# Altium PCB BSR049A.PcbDoc (part 3 of 3)
Units mil, origin at the board's own origin, x right, y up, seen from the top; angles counter-clockwise.
Board outline 3160 x 2500 mil, 4 copper layers (Top Layer1, Layer2, Layer3, Bottom Layer4), stack 61.2 mil thick; 91 components, 27 nets, 205 pads, 285 vias.
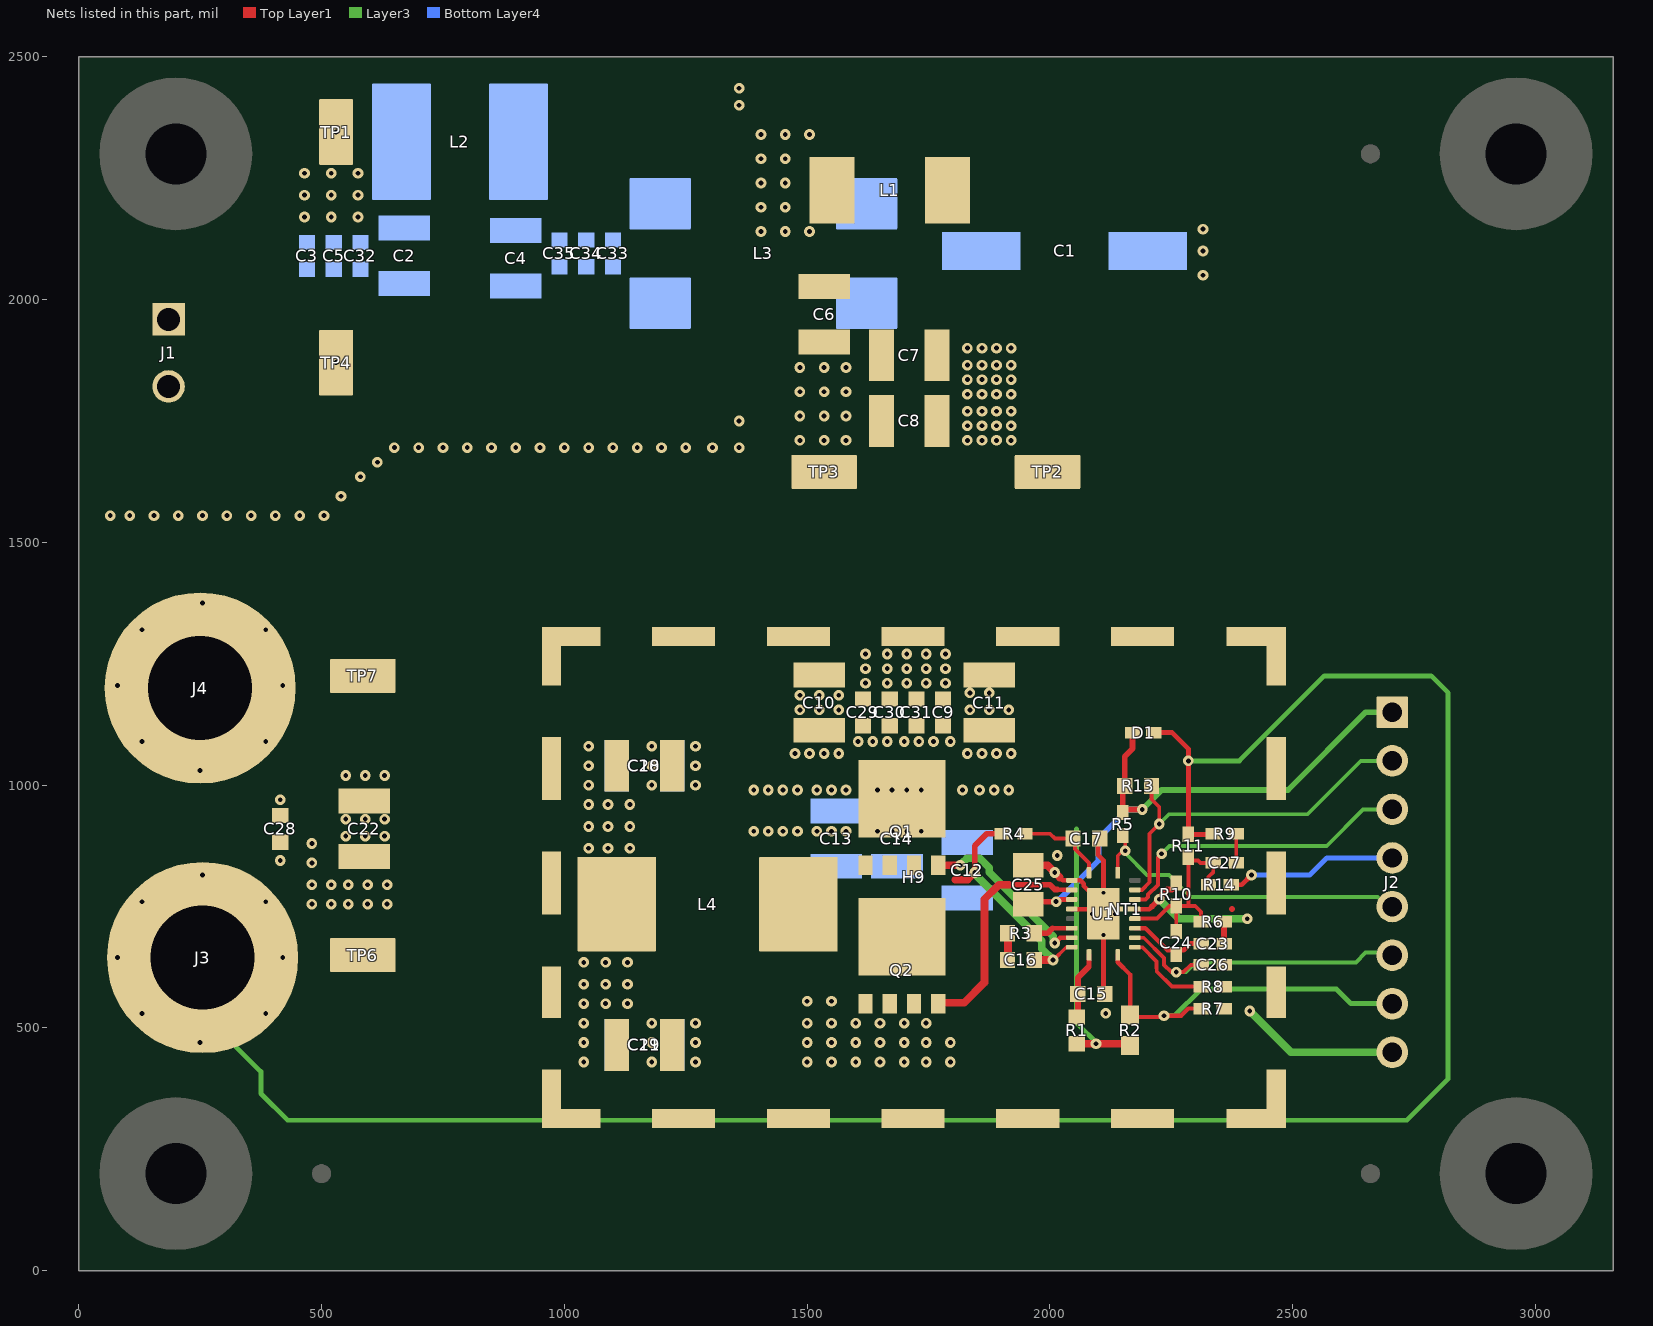
[diagram p4: the nets of this part, all layers, seen from the top]

## Via types
v1: diameter 22, hole 10, Top Layer1 to Bottom Layer4, tented both sides, 263 vias
v2: diameter 22, hole 10, Top Layer1 to Bottom Layer4, 18 vias
v3: diameter 19.68, hole 7.87, Top Layer1 to Bottom Layer4, 4 vias

## Nets (pads, with @x,y where several pads share a name; then routed paths per layer and width w, separated by ;. In a path a pad name is that pad's centre, name@x,y a point inside that pad or via, vN(x,y) a via of type N, cw(c..) or ccw(c..) an arc to the next point about the centre after c; other vN are vias at no path point)
AGND: C26.1 J2.8 NT1.1 R7.1 R8.2 R10.1 U1.6 | length 638.7
  Top Layer1 w9.5: U1.6@2174.96,744.84 2204.84,744.84 2210,750
  Top Layer1 w12: 2210,750 v1(2225,765) 2230,770 2230,773.66 2241.34,785 2251,785 R10.1@2260,794 ; 2374.84,744.84 2375,745
  Layer3 w16: v1(2225,765) 2265,725 v1(2406.38,725) ; v1(2411.38,535) 2496.38,450 2695,450 J2.8@2705,440
COMP: C23.1 C24.1 U1.4 | length 154.5
  Top Layer1 w9: U1.4@2174.96,705.47 2196.51,705.47 2241.98,660 2251.38,660 C24.1@2260,651.38
  Top Layer1 w10: C24.1@2270,660 2275,660 2288.62,673.62 C23.1@2311.38,673.62
EN: J2.7 R2.2 R7.2 U1.1 | length 801.3
  Top Layer1 w8: 2285,540 R7.2@2311.38,540
  Top Layer1 w9: U1.1@2139.53,650.35 2139.53,635.47 2165,610 2165,522.56 2232.56,522.56 v1(2235,525) 2270,525 2285,540
  Layer3 w10: v1(2235,525) 2256.38,525 2311.38,580 2590,580 2620,550 2695,550 J2.7@2705,540
FB: C24.2 C27.2 R6.1 R10.2 R11.2 R14.2 U1.5 | length 430.9
  Top Layer1 w8: U1.5@2174.96,725.16 2220.16,725.16 2246.38,751.38 R10.2@2260,751.38 ; C24.2@2260,698.62 R10.2@2260,751.38 ; R6.1@2311.38,718.62 2311.38,739.27 2299.27,751.38 2285,751.38 ; R14.2@2326.38,795 2326.38,811.38 2336.38,821.38 C27.2@2336.38,840 2310,840 2305,845 2291.38,845 R11.2@2285,851.38 2285,751.38 ; R10.2@2260,751.38 2285,751.38
GND: C1.2 C6.2 C7.2 C8.2 C9.2 C10.2 C11.2 C12.2 C13.2 C14.2 C15.2 C17.2 C18.2 C19.2 C20.2 C21.2 C22.2 C25.2 C28.2 C29.2 C30.2 C31.2 H9.1 J4.1 L3.2 NT1.2 Q2.1 Q2.2 Q2.3 TP3.1 TP7.1 U1.12 U1.15 U1.21@2110,735 | length 573.3
  Top Layer1 w9.5: 2020,810 2026.1,803.9 U1.12@2045.04,803.9 2062.79,803.9 2069.47,797.21 2069.47,792.28 2110,751.76 U1.21@2110,735 ; U1.15@2045.04,744.84 U1.21@2100.16,744.84
  Top Layer1 w10: C17.2@2098.62,890 2098.62,856.38 2110,845 v3(2110,778.31) U1.21@2110,751.76 ; U1.21@2110,735 v3(2110,691.69) 2110,572.56 C15.2@2112.56,570
  Top Layer1 w16: C25.2@1955,835 1995,835 v1(2010,820) 2020,810
  other v1: 1180,430 1270,430 1500,430 1550,430 1600,430 1650,430 1700,430 1745,430 1795,430 1180,470 1270,470 1500,470 1550,470 1600,470 1650,470 1700,470 1745,470 1795,470 1180,510 1270,510 1500,510 1550,510 1600,510 1650,510 1700,510 1745,510 2115,530 1500,555 1550,555 2015,855 550,930 590,930 630,930 415,970 1180,1000 1270,1000 550,1020 590,1020 630,1020 1180,1040 1270,1040 1180,1080 1270,1080 1485,1185 1525,1185 1565,1185 1835,1190 1875,1190 1620,1210 1665,1210 1705,1210 1745,1210 1785,1210 1620,1240 1665,1240 1705,1240 1745,1240 1785,1240 1620,1270 1665,1270 1705,1270 1745,1270 1785,1270 65,1555 105,1555 155,1555 205,1555 255,1555 305,1555 355,1555 405,1555 455,1555 505,1555 540,1595 580,1635 615,1665 650,1695 700,1695 750,1695 800,1695 850,1695 900,1695 950,1695 1000,1695 1050,1695 1100,1695 1150,1695 1200,1695 1250,1695 1305,1695 1360,1695 1485,1710 1535,1710 1580,1710 1360,1750 1485,1760 1535,1760 1580,1760 1485,1810 1535,1810 1580,1810 1485,1860 1535,1860 1580,1860 2315,2050 2315,2100 2315,2145 1360,2400 1360,2435
  other v2: 250,1030 130,1090 385,1090 80,1205 420,1205 130,1320 385,1320 255,1375
  other v3: 2086.38,735 2133.62,735
Gnd_EMI: C2.2 C3.2 C4.2 C5.2 C32.2 C33.2 C34.2 C35.2 J1.2 L3.3 TP4.1
  other v2: 530,1870
HO: Q1.4 U1.18 | length 362.4
  Top Layer1 w9.5: v1(2010,675) 2020.79,685.79 U1.18@2045.04,685.79
  Top Layer1 w16: Q1.4@1770,834.96 v1(1815,834.96)
  Layer3 w16: v1@1820,840 1829.42,849.42 1855.58,849.42 1875,830 1875,820.93 2007,688.93 2007,678 v1(2010,675)
ILIM: C17.1 R4.1 U1.11 | length 189.3
  Top Layer1 w8: R4.1@1948.62,900 2000,900 2010,890 C17.1@2047.44,890 2051.38,890 2051.38,868.62 2080.47,839.53 U1.11@2080.47,819.65
LO: Q2.4 U1.13 | length 480.6
  Top Layer1 w9.5: 2015.79,784.21 U1.13@2045.04,784.21
  Top Layer1 w10: 2015,785 2015.79,784.21
  Top Layer1 w12: 1915,795 2000,795 2010,785 2015,785
  Top Layer1 w16: Q2.4@1770,551.83 1823.17,551.83 1865,593.66 1865,765 1895,795 1915,795
NetC4_1: C4.1 C33.1 C34.1 C35.1 L2.2 L3.4
NetC6_1: C6.1 L1.1 L3.1
  other v1: 1405,2140 1455,2140 1505,2140 1405,2190 1455,2190 1405,2240 1455,2240 1405,2290 1455,2290 1405,2340 1455,2340 1505,2340
NetC15_1: C15.1 R1.2 U1.20 | length 135.8
  Top Layer1 w9.5: 2080.47,625.47 U1.20@2080.47,650.35
  Top Layer1 w10: 2080,625.94 2080.47,625.47
  Top Layer1 w12: R1.2@2057.44,525 C15.1@2057.44,570 2057.44,603.39 2080,625.94
NetC16_1: C16.1 R3.2 | length 55
  Top Layer1 w16: C16.1@1913.5,640 R3.2@1913.5,695
NetC23_2: C23.2 R6.2 | length 45
  Top Layer1 w12: C23.2@2358.62,673.62 R6.2@2358.62,718.62
NetC27_1: C27.1 R9.2 | length 60
  Top Layer1 w8: C27.1@2383.62,840 R9.2@2383.62,900
NetR3_1: R3.1 U1.17 | length 84.7
  Top Layer1 w8: R3.1@1961.5,695 R3.1@1961.5,697.87
  Top Layer1 w9.5: 2005.47,705.47 U1.17@2045.04,705.47
  Top Layer1 w10: 1995,695 1997.87,697.87
  Top Layer1 w12: R3.1@1967.56,695 1995,695 ; 1997.87,697.87 2005.47,705.47
PGOOD: J2.5 R5.2 U1.10 | length 692.8
  Top Layer1 w8: U1.10@2139.53,819.65 2139.53,854.53 2150,865 v1(2155,865) 2155,891.38 R5.2@2150,896.38
  Layer3 w8: v1(2155,865) 2155,860 2200,815 2245,815 2290,770 2675,770 J2.5@2705,740
RT: R8.1 U1.2 | length 183.2
  Top Layer1 w8: U1.2@2174.96,666.1 2190.28,666.1 2219.13,637.25 2219.13,623.42 2220,622.55 2220,616.38 2251.38,585 2307.76,585 R8.1@2311.38,588.62
SS: C26.2 J2.6 U1.3 | length 647.8
  Top Layer1 w8: U1.3@2174.96,685.79 2193.04,685.79 2235,643.83 2235,630 2250,615 v1(2260,615) 2275,615 2290,630 C26.2@2311.38,630
  Layer3 w8: v1(2260,615) 2280,615 2300,635 2630,635 2650,655 2690,655 J2.6@2705,640
SW: C16.2 L4.1 Q1.1 Q1.2 Q1.3 Q2.5 R4.2 U1.19 | length 503.1
  Top Layer1 w8: v1(2006.38,640) 2007.35,640 2033.45,666.1 U1.19@2045.04,666.1
  Top Layer1 w12: v1(1845,820) 1845,875 1870,900 R4.2@1901.38,900
  Top Layer1 w16: 1805,805 1830,805 v1(1845,820) ; C16.2@1967.56,640 v1(2006.38,640)
  Layer3 w16: v1(1845,820) 1845,817.17 1983.13,679.05 1983.13,663.25 v1(2006.38,640)
SYNCIN: J2.2 R13.2 U1.8 | length 783.8
  Top Layer1 w8: U1.8@2174.96,784.21 2189.21,784.21 2205,800 2205,900 v1(2225,920) 2225,955 2209.09,970.91 R13.2@2209.09,998.46
  Layer3 w8: v1(2225,920) 2245,940 2530,940 2640,1050 J2.2@2705,1050
SYNCOUT: J2.3 U1.7 | length 642.4
  Top Layer1 w8: U1.7@2174.96,764.53 2196.65,764.53 2202.13,770 2202.13,774.47 2222.37,794.72 2222.37,851 v1(2230,858.62)
  Layer3 w8: v1(2230,858.62) 2246.38,875 2570,875 2645,950 J2.3@2705,950
Trim: J2.4 R14.1 | length 354.2
  Top Layer1 w10: R14.1@2373.62,795 2395,795 v1(2415,815)
  Bottom Layer4 w10: v1(2415,815) 2535,815 2570,850 J2.4@2705,850
VCC: C25.1 D1.1 J2.1 R5.1 R13.1 U1.14 | length 1182.5
  Top Layer1 w9.5: v1(2012.71,760.13) 2017.12,764.53 U1.14@2045.04,764.53
  Top Layer1 w12: C25.1@1955,750 1965,760 v1@2005,760 ; R5.1@2150,943.62 R5.1@2150,945 ; R13.1@2150,990 R5.1@2150,945 ; R13.1@2153.98,998.46 2153.98,1058.98 2170.16,1075.16 D1.1@2170.16,1108.21 ; v1(2190,950) 2155,950 R5.1@2150,945
  Layer3 w12: v1(2190,950) 2190,955 2192.5,952.5 2230,990 2490,990 2650,1150 2695,1150 J2.1@2705,1140
  Bottom Layer4 w12: v1(2012.71,760.13) 2015.13,760.13 2100,845 2100,890 2160,950 v1(2190,950)
VIN: C1.1 C7.1 C8.1 C9.1 C10.1 C11.1 C12.1 C13.1 C14.1 C29.1 C30.1 C31.1 L1.2 Q1.5 R1.1 R2.1 TP2.1 | length 573.6
  Top Layer1 w16: R1.1@2055,467.44 R2.1@2165,467.44
  Layer3 w10: 2055,910 2055,510 v1@2100,465
  other v1: 2095,467.44 1390,905 1420,905 1450,905 1480,905 1520,905 1550,905 1580,905 1645,905 1675,905 1705,905 1735,905 1390,990 1420,990 1450,990 1480,990 1520,990 1550,990 1580,990 1645,990 1675,990 1705,990 1735,990 1820,990 1855,990 1885,990 1915,990 1475,1065 1505,1065 1535,1065 1565,1065 1830,1065 1860,1065 1890,1065 1920,1065 1605,1090 1635,1090 1665,1090 1700,1090 1730,1090 1760,1090 1795,1090 1485,1155 1525,1155 1565,1155 1835,1155 1875,1155 1915,1155 1830,1710 1860,1710 1890,1710 1920,1710 1830,1740 1860,1740 1890,1740 1920,1740 1830,1770 1860,1770 1890,1770 1920,1770 1830,1805 1860,1805 1890,1805 1920,1805 1830,1835 1860,1835 1890,1835 1920,1835 1830,1865 1860,1865 1890,1865 1920,1865 1830,1900 1860,1900 1890,1900 1920,1900
Vin_EMI: C2.1 C3.1 C5.1 C32.1 J1.1 L2.1 TP1.1
  other v1: 465,2170 520,2170 575,2170 465,2215 520,2215 575,2215 465,2260 520,2260 575,2260
  other v2: 530,2345
VOUT: C18.1 C19.1 C20.1 C21.1 C22.1 C28.1 D1.2 J3.1 L4.2 R9.1 R11.1 TP6.1 | length 4561.4
  Top Layer1 w10: D1.2@2213.46,1108.21 2251.79,1108.21 2285,1075 v1(2285,1050) R11.1@2285,898.62 R9.1@2335,898.62
  Layer3 w10: J3.1@255,645 255,530 375,410 375,365 430,310 2735,310 2820,395 2820,1190 2785,1225 2565,1225 2390,1050 v1(2285,1050)
  other v1: 1040,430 1040,470 1040,510 1040,550 1085,550 1130,550 1040,590 1085,590 1130,590 1040,635 1085,635 1130,635 480,755 520,755 555,755 595,755 635,755 480,795 520,795 555,795 595,795 635,795 480,840 415,845 1050,870 1090,870 1135,870 480,880 550,895 590,895 630,895 1050,915 1090,915 1135,915 1050,960 1090,960 1135,960 1050,1000 1050,1040 1050,1080
  other v2: 250,470 130,530 385,530 80,645 420,645 130,760 385,760 255,815
pads on no net: FID1.1 FID2.1 FID3.1 FID4.1 FID5.1 FID6.1 H1.1 H2.1 H3.1 H4.1 H5.0 H6.0 H7.0 H8.0 U1.9 U1.16 U1.21@2091.3,707.24 U1.21@2091.3,762.76 U1.21@2128.7,707.24 U1.21@2128.7,762.76

## Polygon pours and split planes (outlines as drawn)
GND on Top Layer1 "GND_L01_P384" (solid, pour order 384): -2.75,1.08 -2.75,1580 480,1580 625,1725 1327.25,1725 1327.25,2501.08 3157.25,2501.08 3157.25,1.08
VOUT on Top Layer1 "VOUT_L01_P383" (solid, remove dead copper, pour order 383): 660,910 0,910 0,395 5,400 660,400
VOUT on Top Layer1 "VOUT_L01_P380" (solid, remove dead copper, pour order 380): 1155,395 1155,610 1207.12,610 1207.12,905 1150,905 1150,1125 1010,1125 1010,395
AGND on Top Layer1 "AGND_L01_P377" (solid, remove dead copper, pour order 377): 2425,515 2340,515 2340,755 2425,755
VIN on Top Layer1 "VIN_L01_P382" (solid, remove dead copper, pour order 382): 1725,2280 1725,2005 1725,1625 1745,1605 2060,1605 2075,1620 2075,2280 2055,2300 1745,2300
SW on Top Layer1 "SW_L01_P379" (solid, remove dead copper, pour order 379): 1830,605 1440,605 1400,645 1400,855 1410,865 1830,865
VIN on Top Layer1 "VIN_L01_P381" (solid, remove dead copper, pour order 381): 2090,890 1320,890 1300,910 1300,1145 1320,1165 2075,1165 2090,1150
NetC6_1 on Top Layer1 "NETC6_1_L01_P378" (solid, remove dead copper, pour order 378): 1340,1995 1590,1995 1600,2005 1600,2345 1590,2355 1345,2355 1330,2340 1330,2005
GND on Layer3 "GND_L03_P389" (solid, pour order 389): 0,0 0,1580 480,1580 625,1725 1330,1725 1330,2500 3160,2500 3160,0
VOUT on Layer3 "VOUT_L03_P388" (solid, remove dead copper, pour order 388): 1125,395 1125,535 1155,535 1155,975 1125,975 1125,1125 1010,1125 1010,985 935,910 0,910 0,395 1010,395
VIN on Layer3 "VIN_L03_P387" (solid, remove dead copper, pour order 387): 1890,2035 2020,2035 2180,1875 2180,1056.16 2073.84,950 1895,950 1895,1205 1805,1295 1805,1690 1805,2000 1840,2035
VIN on Layer3 "VIN_L03_P386" (solid, remove dead copper, pour order 386): 2060,890 1365,890 1345,910 1345,1145 1365,1165 2075,1165 2075,905
Vin_EMI on Layer3 "VIN_EMI_L03_P406" (solid, remove dead copper, pour order 406): 50,1900 235,1900 365,1900 420,1955 420,2070 465,2115 715,2115 730,2130 730,2450 675,2505 455,2505 0,2050 0,1950
VOUT on Bottom Layer4 "VOUT_L04_P393" (solid, remove dead copper, pour order 393): 1155.2,393.7 1155.2,540.14 1199.11,540.14 1199.11,970 1155.2,970 1155.2,1123.7 1009.11,1123.7 1009.11,393.7
VIN on Bottom Layer4 "VIN_L04_P391" (solid, remove dead copper, pour order 391): 1930,890 1375,890 1362.5,902.5 1362.5,992.5 1375,1005 1930,1005
GND on Bottom Layer4 "GND_L04_P398" (solid, pour order 398): 0,0 0,1580 480,1580 625,1725 1330,1725 1330,2500 3160,2500 3160,0
NetC6_1 on Bottom Layer4 "NETC6_1_L04_P392" (solid, remove dead copper, pour order 392): 1345,2120 1674.42,2120 1695,2140.58 1695,2320 1660,2355 1345,2355 1330,2340 1330,2135
VIN on Bottom Layer4 "VIN_L04_P390" (solid, remove dead copper, pour order 390): 1779.39,2159.37 1935.63,2159.37 1944.25,2150.75 1944.25,1709.25 1929.77,1694.77 1785.21,1694.77 1769.25,1710.8 1771.46,2151.47
Vin_EMI on Bottom Layer4 "VIN_EMI_L04_P400" (solid, remove dead copper, pour order 400): 50,1900 235,1900 365,1900 420,1955 420,2070 465,2115 715,2115 730,2130 730,2450 675,2505 455,2505 0,2050 0,1950
Gnd_EMI on Bottom Layer4 "GND_EMI_L04_P402" (solid, remove dead copper, pour order 402): 55,1870 245,1870 375,1870 445,1940 445,2065 455,2075 1240,2075 1265,2050 1265,1805 1240,1780 620,1780 490,1650 55,1650 0,1705 0,1815
NetC4_1 on Bottom Layer4 "NETC4_1_L04_P404" (solid, remove dead copper, pour order 404): 1240,2120 845,2120 835,2130 835,2450 885,2500 1210,2500 1265,2445 1265,2145
GND on Layer2 "GND_L02_P385" (solid, pour order 385): 0,0 0,1580 480,1580 625,1725 1330,1725 1330,2500 3160,2500 3160,0

## Keep-outs
Keep-Out Layer:
  the board outline again, w8

## Other copper
Top Layer1:
  pour cut-out: 1325,1995 1325,1945 1715.02,1945 1714.8,1992.35 1680,1995
  pour cut-out: 1690,1985 1600,1985 1600,2370 1714.8,2370 1810,2370 1810,2310 1720,2310 1720,1985
  pour cut-out: 1810,2360 1810,2380 1327.5,2380 1327.5,2360
  text "'.Layer_Name'" at 195,-1310 h60
Layer2:
  text "'.Layer_Name'" at 185,-1310 h60
Layer3:
  text "'.Layer_Name'" at 185,-1315 h60
Bottom Layer4:
  rectangle net VIN: 1770,855 1890,915
  rectangle net Vin_EMI: 445,2102 460,2110
  pour cut-out: 1695,2105 1695,2375 1715,2355 1715,2125
  pour cut-out: 1330,2125 1330,2105 1695,2105 1695,2125
  pour cut-out: 1695,2354.23 1695,2374.23 1330,2374.23 1330,2354.23
  text "'.Layer_Name'" at 185,-1310 h60

## Silkscreen, mask and mechanical layers (free items; w line width, h text height)
Top Overlay:
  lines w8: 2095,1005 2120,975 ; 2120,975 2120,990 2105,975 2120,975
  text "VIN+" at 235,2050 h72.83
  text "LM5146-Q1-EVM12V" at 2340,1745 h80
  text "VIN-" at 250,1665 h72.83
  text "'.PRJ_Number' - '.PCB_Rev'" at 2345,1645 h72.83
  text "VOUT-" at 395,1375 h72.83
  text "VCC" at 2790,1120 h72.83
  text "SYNCIN" at 2790,1030 h72.83
  text "SYNCOUT" at 2790,940 h72.83
  text "TRIM" at 2790,835 h72.83
  text "PGOOD" at 2790,730 h72.83
  text "SS" at 2790,625 h72.83
  text "EN" at 2790,520 h72.83
  text "VOUT+" at 430,450 h72.83
  text "AGND" at 2790,420 h72.83
  text "'.Layer_Name'" at 180,-1310 h60
Bottom Overlay:
  text "'.Layer_Name'" at 170,-1315 h60
Top Paste:
  text "'.Layer_Name'" at 170,-1310 h60
Bottom Paste:
  text "'.Layer_Name'" at 175,-1315 h60
Top Solder:
  text "'.Layer_Name'" at 175,-1310 h60
Bottom Solder:
  text ".Layer_Name" at 195,-1308.49 h60
Drill Guide:
  text ".Layer_Name" at 195,-1308.49 h60
M1 Board Outline:
  the board outline again, w8
  text "M1 Board Outline" at 190,-1310 h60
M2 Board Dimensions:
  rectangle: -375,-685 -250,-560
  rectangle: -250,-810 125,-685
  lines w7: -375,-685 625,-685 ; -250,-810 -250,-560 ; -125,-810 -125,-560 ; 125,-810 125,-560 ; 375,-810 375,-560 ; -375,-810 625,-810 625,-560 -375,-560 -375,-810
  text ".Layer_Name" at 195,-1308.49 h60
M3 3D STEP Top:
  text ".Layer_Name" at 195,-1308.49 h60
M4 3D STEP Bottom:
  text ".Layer_Name" at 195,-1308.49 h60
M5 Assembly Top:
  lines w10: -674,-1380.17 5926,-1380.17 ; -674,-1176.83 5928,-1176.83 ; -674,-973.5 -674,-1583.5 3331,-1583.5 5928,-1583.5 5928,-973.5 -673.5,-973.5 -673.5,-1583.5 902,-1583.5 ; 1791,-1583.5 1791,-973.5 ; 3058,-1176.83 3058,-973.5 ; 3898,-1176.83 3898,-973.5 ; 4520,-1590 4520,-1387.17
  text "COMPONENTS MARKED 'DNP' SHOULD NOT BE POPULATED." at 771.5,-768.5 h60
  text "ASSEMBLY VARIANT:" at 771,-884 h60
  text ".VariantName" at 1807,-884 h60
  text "PCB VIEWED FROM TOP SIDE" at -610.5,-1105.67 h60
  text "BOARD #:" at 1866,-1105.67 h60
  text ".PRJ_Number" at 2411.5,-1105.67 h60
  text "REV:" at 3256,-1105.67 h60
  text ".PCB_Rev" at 3547.5,-1105.67 h60
  text "SVN REV:" at 4094,-1105.67 h60
  text ".VersionControl_RevNumber" at 4600,-1105.67 h60
  text "'.Layer_Name'" at 180,-1305 h60
  text "PLOT NAME =" at -610.5,-1514.34 h60
  text ".plot_File_Name" at 195,-1514.34 h60
  text "GENERATED    :" at 1868,-1514.34 h60
  text ".Print_Date" at 2737.5,-1514.34 h60
  text ".Print_Time" at 3466.5,-1514.34 h60
  text "TEXAS INSTRUMENTS" at 4731,-1514.34 h60
M6 Assembly Bottom:
  lines w10: -674.5,-1177.33 5927.5,-1177.33 ; -672.5,-1380.67 5927.5,-1380.67 ; 733.5,-1590.5 733.5,-1387.67 ; 1355.5,-1177.33 1355.5,-974 ; 2195.5,-1177.33 2195.5,-974 ; 3462.5,-1584 3462.5,-974 ; 4351.5,-1584 5927,-1584 5927,-974 -674.5,-974 -674.5,-1584 1922.5,-1584 5927.5,-1584 5927.5,-974
  text "COMPONENTS MARKED 'DNP' SHOULD NOT BE POPULATED." at 5720,-768 h60
  text ".VariantName" at 4676,-884 h60
  text "ASSEMBLY VARIANT:" at 5715,-884 h60
  text ".VersionControl_RevNumber" at 653.5,-1106.17 h60
  text "SVN REV:" at 1159.5,-1106.17 h60
  text ".PCB_Rev" at 1706,-1106.17 h60
  text "REV:" at 1997.5,-1106.17 h60
  text ".PRJ_Number" at 2842,-1106.17 h60
  text "BOARD #:" at 3387.5,-1106.17 h60
  text "PCB VIEWED FROM BOTTOM SIDE" at 5864,-1106.17 h60
  text "'.Layer_Name'" at 180,-1310 h60
  text "TEXAS INSTRUMENTS" at 522.5,-1514.84 h60
  text ".Print_Time" at 1787,-1514.84 h60
  text ".Print_Date" at 2516,-1514.84 h60
  text "GENERATED    :" at 3385.5,-1514.84 h60
  text ".plot_File_Name" at 5058.5,-1514.84 h60
  text "PLOT NAME =" at 5864,-1514.84 h60
M9 Title Sheet:
  drawing of 57 lines, arcs and shapes, not listed
  text "1" at 357.84,7586.5 h70
  text "2" at 2853.5,7586.5 h70
  text "3" at 5342.84,7586.5 h70
  text "4" at 7849.51,7586.5 h70
  text "5" at 10348.5,7586.5 h70
  text "6" at 12853.5,7586.5 h70
  text "A" at -798.5,6443.5 h70
  text "A" at 14001.5,6443.5 h70
  text "B" at -798.5,4063.5 h70
  text "B" at 14001.5,4063.5 h70
  text "C" at -798.5,1688.5 h70
  text "C" at 14001.5,1688.5 h70
  text "PROJECT TITLE:" at 10961.5,-172.5 h45
  text ".PRJ_Title" at 11011.5,-305.83 h70
  text "DESIGNED FOR:" at 10961.5,-473.5 h45
  text ".PRJ_Customer" at 11011.5,-613.5 h70
  text "D" at -798.5,-681.5 h70
  text "D" at 14001.5,-681.5 h70
  text "FILE NAME:" at 10961.5,-773.5 h45
  text ".PCB_File_Name_No_Path" at 11011.5,-893.5 h70
  text "Texas Instruments (TI) and/or its licensors do not warrant the accuracy or completeness of this specification" at 5992,-1055.34 h45
  text "ENGINEER:" at 10961.5,-1063.5 h45
  text "LAYOUT BY:" at 12466.5,-1063.5 h45
  text "or any information contained therein. TI and/or its licensors do not warrant that this design will meet" at 5947.01,-1168 h45
  text ".PRJ_Engineer" at 11011.5,-1218.49 h70
  text ".PCB_Layout" at 12517,-1218.49 h70
  text "the specifications, will be suitable for your application or fit for any particular purpose, or will operate in" at 5947.01,-1280.67 h45
  text ".Layer_Name" at 195,-1308.49 h60
  text "ALTIUM DESIGNER VERSION:" at 12466.5,-1373.5 h45
  text "an implementation. TI and/or its licensors do not warrant that the design is production worthy. You should" at 5947.01,-1393.33 h45
  text "completely validate and test your design implementation to confirm the system functionality for your application." at 5992,-1506 h45
  text ".print_Scale" at 11011.5,-1506.83 h70
  text ".Application_BuildNumber" at 12517,-1506.83 h70
  text "1" at 357.84,-1713.5 h70
  text "2" at 2853.5,-1713.5 h70
  text "3" at 5342.84,-1713.5 h70
  text "4" at 7849.51,-1713.5 h70
  text "5" at 10348.5,-1713.5 h70
  text "6" at 12853.5,-1713.5 h70
M10 Fab Notes:
  drawing of 185 lines, arcs and shapes, not listed
  text "DESIGN INFORMATION" at 11999.02,5460 h60
  text "MIN. TRACK WIDTH:" at 11354.46,5280 h60
  text "8" at 12450.7,5280 h60
  text "MIL" at 12605.46,5280 h60
  text "MIN. CLEARANCE:" at 11354.46,5148 h60
  text "0.2" at 12390.7,5148 h60
  text "mm" at 12605.46,5148 h60
  text "MIN. VIA PAD SIZE:" at 11354.46,5016 h60
  text "24" at 12420.71,5016 h60
  text "MIL" at 12605.46,5016 h60
  text "0.05mm (2MIL)" at 12049.46,4874.29 h60
  text "MINIMUM ANNULAR RING" at 11025.23,4870 h60
  text "EXTERNAL" at 12757.46,4870 h60
  text "PER" at 11225.23,4752 h60
  text "IPC-D-275 CLASS 2 LEVEL C" at 11445.23,4752 h60
  text "MIL, HOLES" at 12933.46,4639.71 h60
  text "+/-" at 12541,4639 h60
  text "+/-" at 13395,4639 h60
  text "REGISTRATION TOLERANCES:" at 11025.23,4634 h60
  text "METAL" at 12225,4634 h60
  text "5" at 12801.2,4634 h60
  text "3" at 13634.2,4634 h60
  text "MIL" at 13750.46,4634 h60
  text "MATERIAL:" at 10950.46,4424.54 h60
  text "FR-4 High Tg" at 11936.9,4284.21 h60
  text "FR-408" at 11371.46,4275.64 h60
  text "X" at 11783.46,4275.64 h60
  text "OTHER" at 12859.46,4275.64 h60
  text "62 MIL (1.6mm) +/-10%" at 11691.56,4112.92 h60
  text "THICKNESS:" at 11025.23,4108.64 h60
  text "X" at 11563.4,4108.64 h60
  text "OTHER" at 12976.46,4108.64 h60
  text "TOLERANCE:" at 11025.23,3950.64 h60
  text "X" at 11864.53,3950.64 h60
  text "ANSI IPC-6012 TYPE 3 CLASS 2" at 12051.48,3950.64 h60
  text "OTHER +/-" at 12051.46,3794.64 h60
  text "BOW & TWIST:" at 11025.23,3637.64 h60
  text "X" at 11864.53,3637.64 h60
  text "ANSI IPC-6012 TYPE 3 CLASS 2" at 12051.48,3637.64 h60
  text "OTHER +/-" at 12051.46,3479.13 h60
  text "DRILLING:" at 10950.46,3340.64 h60
  text "REFERENCE:" at 11025.23,3223.64 h60
  text "X" at 11673.46,3223.64 h60
  text "AS SHOWN" at 11860.46,3223.64 h60
  text "X" at 12574.46,3223.64 h60
  text "NC_DRILL FILES" at 12711.46,3223.64 h60
  text "PTH MIN COPPER THICKNESS:" at 11025.23,3065.64 h60
  text "X" at 12375.46,3065.64 h60
  text "1MIL" at 12512.46,3065.64 h60
  text "OTHER" at 13009.46,3065.64 h60
  text "BOARD FINISH:" at 10950.46,2906.64 h60
  text "SILKSCREEN:" at 11105.68,2788.64 h60
  text "X" at 12054.46,2788.64 h60
  text "TOP" at 12180.46,2788.64 h60
  text "X" at 12564.46,2788.64 h60
  text "BOTTOM" at 12691.46,2788.64 h60
  text "SILKSCREEN COLOR:" at 11105.68,2621.64 h60
  text "X" at 12053.42,2621.64 h60
  text "WHITE" at 12180.46,2621.64 h60
  text "OTHER" at 12691.46,2621.64 h60
  text "SOLDER RESIST COLOR:" at 11105.68,2451.64 h60
  text "X" at 11670,2295 h60
  text "GREEN" at 11800.46,2292.44 h60
  text "BLUE" at 12391.46,2292.44 h60
  text "OTHER" at 12929.46,2292.44 h60
  text "IMMERSION GOLD (ENIG)" at 12011.46,2103.92 h60
  text "ENEPIG" at 13349,2100.64 h60
  text "SURFACE FINISH:" at 10950.46,2099.64 h60
  text "X" at 11824.51,2099.64 h60
  text "IMM. TIN/SILVER OR EQUIV" at 11280,1942.64 h60
  text "OTHER" at 12711.46,1942.64 h60
  text "ARRAY/PANEL:" at 10950.46,1763.64 h60
  text "CUT AND TRIM PER MECH LAYER 1" at 12011.46,1759.35 h60
  text "N.C. ROUTE" at 12011.46,1607.64 h60
  text "X" at 12690.46,1607.64 h60
  text "V. SCORE" at 12877.46,1607.64 h60
  text "CERTIFICATION:" at 10950.46,1470.64 h60
  text "MATERIALS AND WORKMANSHIP FOR ALL PCBS" at 11675.46,1470.64 h60
  text "TO MEET OR EXCEED THE REQUIREMENTS OF:" at 11675.46,1372.64 h60
  text "X" at 11301.96,1236.13 h60
  text "ANSI IPC-A-600F CLASS ->" at 11440.96,1236.13 h60
  text "X" at 13080.02,1236.13 h60
  text "2" at 13198.96,1236.14 h60
  text "1" at 12883.96,1234.64 h60
  text "3" at 13552.96,1234.64 h60
  text "X" at 11304.02,1076.64 h60
  text "UL 94V-0" at 11440.96,1076.64 h60
  text "X" at 12116.02,1076.64 h60
  text "RoHS" at 12252.96,1076.64 h60
  text "OTHER" at 12897.36,1076.64 h60
  text "PER ORDER" at 13294.42,1076.64 h60
  text "ADDITIONAL REQUIREMENTS:" at 10950.46,935.64 h60
  text "MICROSECTION:" at 11025.23,820.64 h60
  text "YES" at 11930.96,820.64 h60
  text "REQUIRED" at 12792.46,664.49 h60
  text "BARE BOARD ELEC. TEST:" at 11025.23,661.64 h60
  text "NONE" at 12330.96,661.64 h60
  text "X" at 12665.46,661.64 h60
  text "PER ORDER" at 13384.46,661.64 h60
  text "MANUFACTURER'S UL:" at 11025.23,504.64 h60
  text "RAIL" at 12190.96,500.35 h60
  text "METAL" at 12682.77,500.35 h60
  text "X" at 13058,500 h60
  text "SILK" at 13194.46,500.35 h60
  text ".Layer_Name" at 195,-1308.49 h60
M11 Gerber Information:
  lines w10: -674,-1380.17 5926,-1380.17 ; -674,-1176.83 5928,-1176.83 ; -674,-973.5 -674,-1583.5 3331,-1583.5 5928,-1583.5 5928,-973.5 -673.5,-973.5 -673.5,-1583.5 902,-1583.5 ; 1791,-1583.5 1791,-973.5 ; 3058,-1176.83 3058,-973.5 ; 3898,-1176.83 3898,-973.5 ; 4520,-1590 4520,-1387.17
  text "ALL ARTWORK VIEWED FROM TOP SIDE" at -610.5,-1105.67 h60
  text "BOARD #:" at 1866,-1105.67 h60
  text ".PRJ_Number" at 2411.5,-1105.67 h60
  text "REV:" at 3256,-1105.67 h60
  text ".PCB_Rev" at 3547.5,-1105.67 h60
  text "SVN REV:" at 4094,-1105.67 h60
  text ".VersionControl_RevNumber" at 4600,-1105.67 h60
  text "LAYER NAME =" at -610.5,-1308.49 h60
  text "PLOT NAME =" at -610.5,-1514.34 h60
  text ".plot_File_Name" at 195,-1514.34 h60
  text "GENERATED    :" at 1868,-1514.34 h60
  text ".Print_Date" at 2737.5,-1514.34 h60
  text ".Print_Time" at 3466.5,-1514.34 h60
  text "TEXAS INSTRUMENTS" at 4731,-1514.34 h60
M12 Stackup:
  drawing of 295 lines, arcs and shapes, not listed
  text "Layer" at 9425.74,7400 h60
  text "Name" at 9835.65,7400 h60
  text "Material" at 10765.4,7400 h60
  text "Thickness" at 11625.16,7400 h60
  text "Constant" at 12275,7400 h60
  text "Board Layer Stack" at 12844.86,7400 h60
  text "1" at 9425.74,7280 h60
  text "Top Overlay" at 9835.65,7280 h60
  text "2" at 9425.74,7160 h60
  text "Top Solder" at 9835.65,7160 h60
  text "Solder Resist" at 10765.4,7160 h60
  text "0.40mil" at 11625.16,7160 h60
  text "3.5" at 12275,7160 h60
  text "3" at 9425.74,7040 h60
  text "Top Layer1" at 9835.65,7040 h60
  text "Copper" at 10765.4,7040 h60
  text "2.80mil" at 11625.16,7040 h60
  text "4" at 9425.74,6920 h60
  text "Dielectric1" at 9835.65,6920 h60
  text "FR-4" at 10765.4,6920 h60
  text "6.00mil" at 11625.16,6920 h60
  text "4.2" at 12275,6920 h60
  text "5" at 9425.74,6800 h60
  text "Layer2" at 9835.65,6800 h60
  text "Copper" at 10765.4,6800 h60
  text "2.80mil" at 11625.16,6800 h60
  text "6" at 9425.74,6680 h60
  text "Dielectric 3" at 9835.65,6680 h60
  text "FR4" at 10765.4,6680 h60
  text "38.00mil" at 11625.16,6680 h60
  text "4.2" at 12275,6680 h60
  text "7" at 9425.74,6560 h60
  text "Layer3" at 9835.65,6560 h60
  text "Copper" at 10765.4,6560 h60
  text "2.80mil" at 11625.16,6560 h60
  text "8" at 9425.74,6440 h60
  text "Dielectric 2" at 9835.65,6440 h60
  text "FR4" at 10765.4,6440 h60
  text "6.00mil" at 11625.16,6440 h60
  text "4.2" at 12275,6440 h60
  text "9" at 9425.74,6320 h60
  text "Bottom Layer4" at 9835.65,6320 h60
  text "Copper" at 10765.4,6320 h60
  text "2.80mil" at 11625.16,6320 h60
  text "10" at 9425.74,6200 h60
  text "Bottom Solder" at 9835.65,6200 h60
  text "Solder Resist" at 10765.4,6200 h60
  text "0.40mil" at 11625.16,6200 h60
  text "3.5" at 12275,6200 h60
  text "11" at 9425.74,6080 h60
  text "Bottom Overlay" at 9835.65,6080 h60
  text ".Layer_Name" at 195,-1308.49 h60
M13 Component Bodies Top:
  text ".Layer_Name" at 195,-1308.49 h60
M14 Component Bodies Bottom:
  text ".Layer_Name" at 195,-1308.49 h60
M15 Courtyards Top:
  text ".Layer_Name" at 195,-1308.49 h60
M16 Courtyards Bottom:
  text ".Layer_Name" at 195,-1308.49 h60
Drill Drawing:
  circle w10: c5043.63,2624.97 r27.59
  lines w10: 5016.04,2349.02 5071.23,2349.02 5071.23,2404.21 5016.04,2404.21 5016.04,2349.02 ; 5016.04,2473.2 5071.23,2473.2 5071.23,2528.39 5016.04,2528.39 5016.04,2473.2 ; 5016.04,2735.35 5029.83,2735.35 5029.83,2721.55 5057.43,2721.55 5057.43,2735.35 5071.23,2735.35 5071.23,2762.94 5057.43,2762.94 5057.43,2776.74 5029.83,2776.74 5029.83,2762.94 5016.04,2762.94 5016.04,2735.35 ; 5016.04,2859.52 5029.83,2859.52 5043.63,2845.72 5057.43,2859.52 5071.23,2859.52 5057.43,2873.32 5071.23,2887.12 5057.43,2887.12 5043.63,2900.91 5029.83,2887.12 5016.04,2887.12 5029.83,2873.32 5016.04,2859.52 ; 5016.04,2997.5 5043.63,2969.9 5071.23,2997.5 5043.63,3025.09 5016.04,2997.5 ; 5027.07,2484.23 5060.19,2484.23 5060.19,2517.35 5027.07,2517.35 5027.07,2484.23
  lines w12: 4966,2311.77 6943.93,2311.77 ; 4966,3056.82 6943.93,3056.82 ; 5303.86,2187.59 5303.86,3181 ; 5635.86,2187.59 5635.86,3181 ; 6272.42,2187.59 6272.42,3181 ; 6531.53,2187.59 6531.53,3181 ; 4966,2187.59 6943.93,2187.59 6943.93,3181 4966,3181 4966,2187.59
  text "Symbol" at 5040.51,3094.08 h72
  text "Quantity" at 5341.11,3094.08 h72
  text "Finished Hole Size" at 5673.12,3094.08 h72
  text "Plated" at 6309.67,3094.08 h72
  text "Hole Type" at 6568.78,3094.08 h72
  text "4" at 5341.11,2969.9 h60
  text "7.87mil (0.200mm)" at 5673.12,2969.9 h60
  text "PTH" at 6309.67,2969.9 h60
  text "Round" at 6568.78,2969.9 h60
  text "281" at 5341.11,2845.72 h60
  text "10.00mil (0.254mm)" at 5673.12,2845.72 h60
  text "PTH" at 6309.67,2845.72 h60
  text "Round" at 6568.78,2845.72 h60
  text "8" at 5341.11,2721.55 h60
  text "40.00mil (1.016mm)" at 5673.12,2721.55 h60
  text "PTH" at 6309.67,2721.55 h60
  text "Round" at 6568.78,2721.55 h60
  text "2" at 5341.11,2597.37 h60
  text "47.24mil (1.200mm)" at 5673.12,2597.37 h60
  text "PTH" at 6309.67,2597.37 h60
  text "Round" at 6568.78,2597.37 h60
  text "4" at 5341.11,2473.2 h60
  text "125.98mil (3.200mm)" at 5673.12,2473.2 h60
  text "PTH" at 6309.67,2473.2 h60
  text "Round" at 6568.78,2473.2 h60
  text "2" at 5341.11,2349.02 h60
  text "214.57mil (5.450mm)" at 5673.12,2349.02 h60
  text "PTH" at 6309.67,2349.02 h60
  text "Round" at 6568.78,2349.02 h60
  text "301 Total" at 5341.11,2224.84 h60
  text ".Layer_Name" at 195,-1308.49 h60

## Dimensions
-375,-810 to 625,-810 on M2 Board Dimensions
0,0 to 0,2500 on M2 Board Dimensions
0,0 to 3160,0 on M2 Board Dimensions

## Text inside footprints (layer, text, board x,y; h text height)
Logo3: Bottom Overlay "For evaluation only; not FCC approved for resale." at 2245.42,71.1 h60